# Altium PCB PCB3.PcbDoc
Units mil, origin at the board's own origin, x right, y up, seen from the top; angles counter-clockwise.
Board outline 2145.01 x 1970.03 mil, 2 copper layers (Top Layer, Bottom Layer); 16 components, 14 nets, 32 pads, 0 vias.
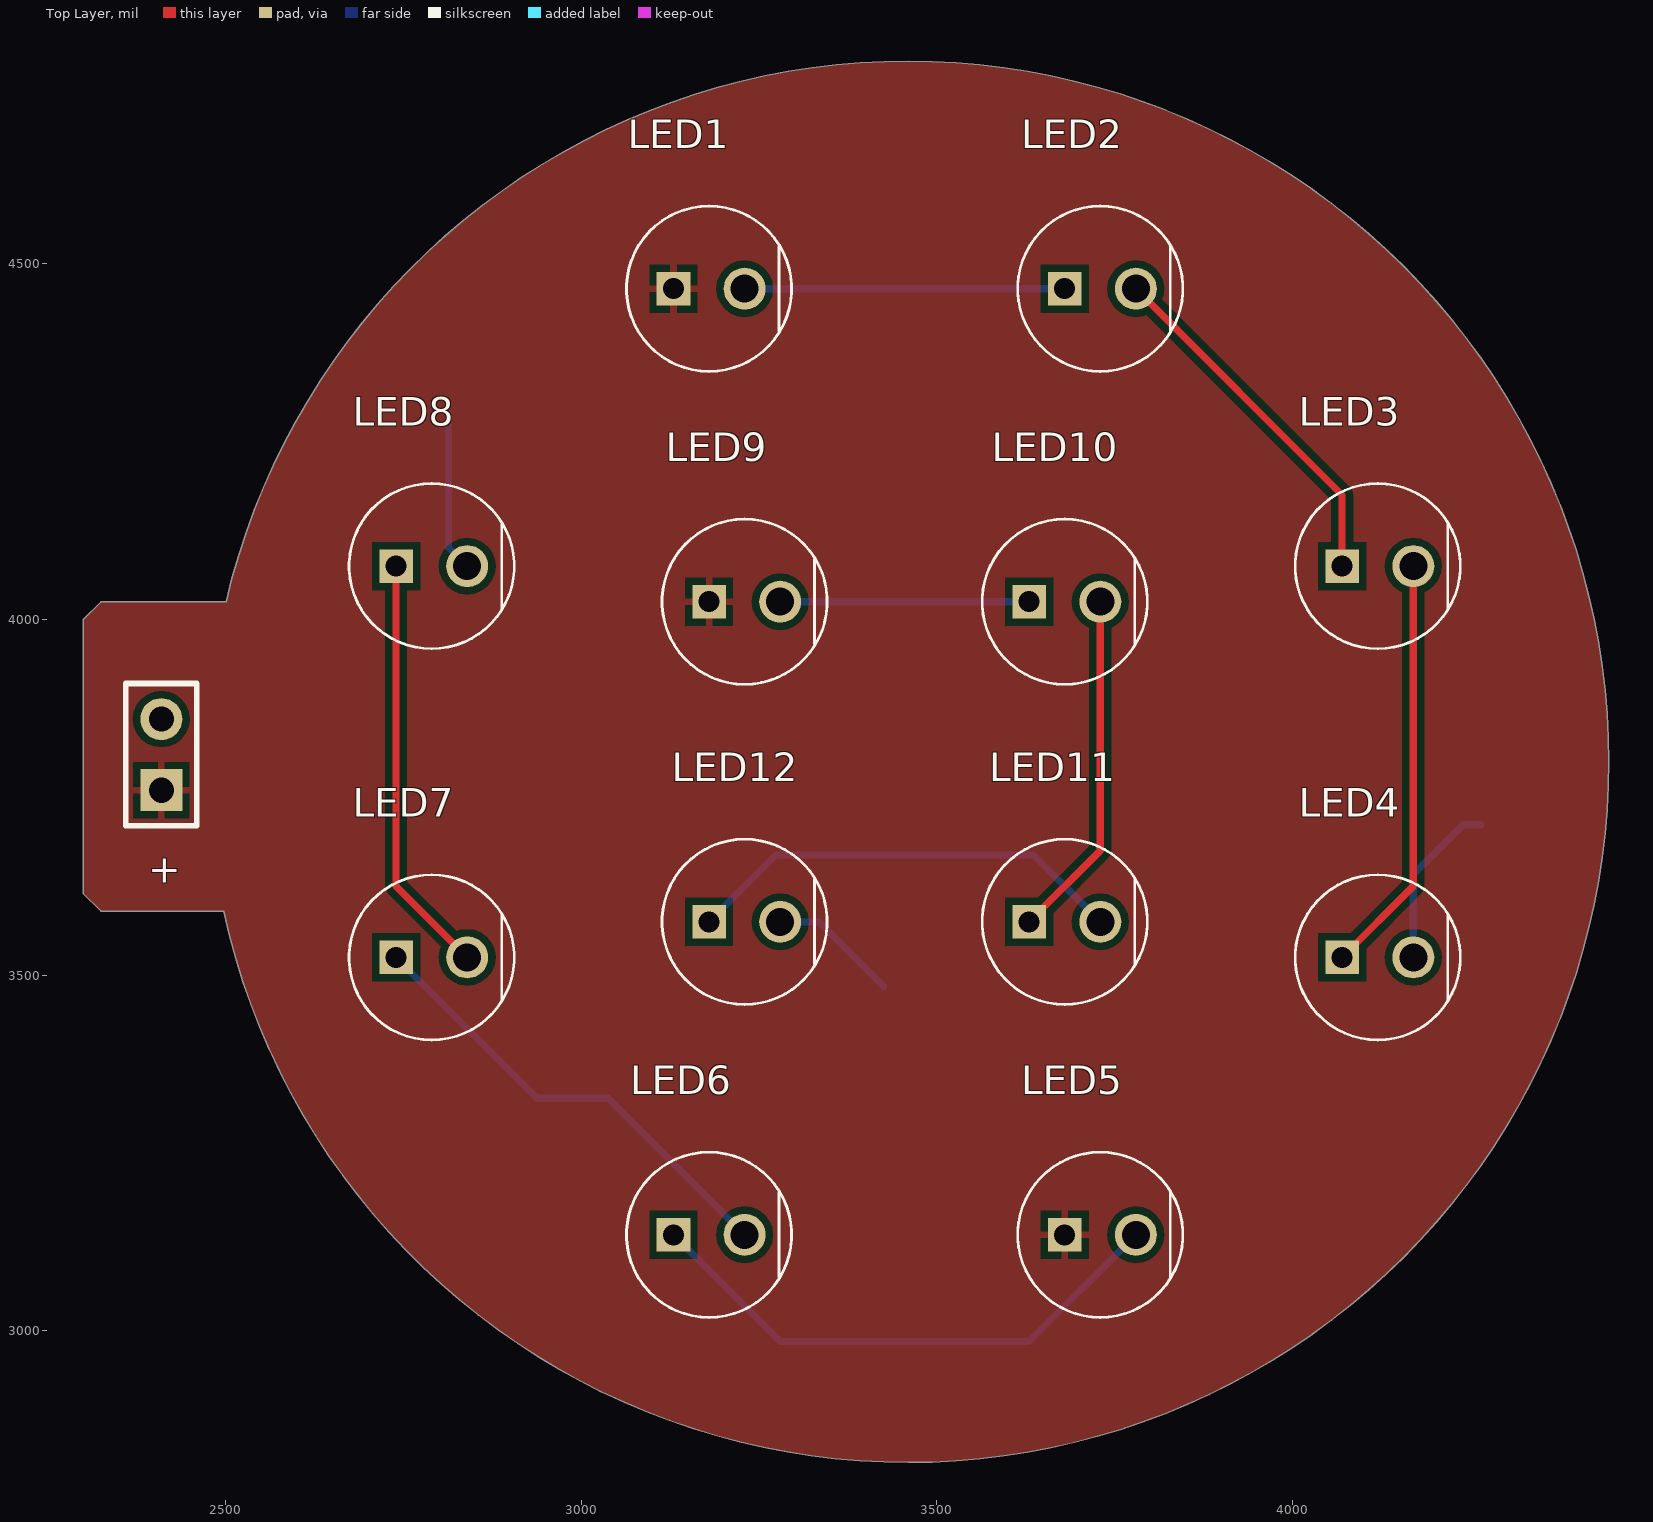
[diagram p0: Top Layer view]
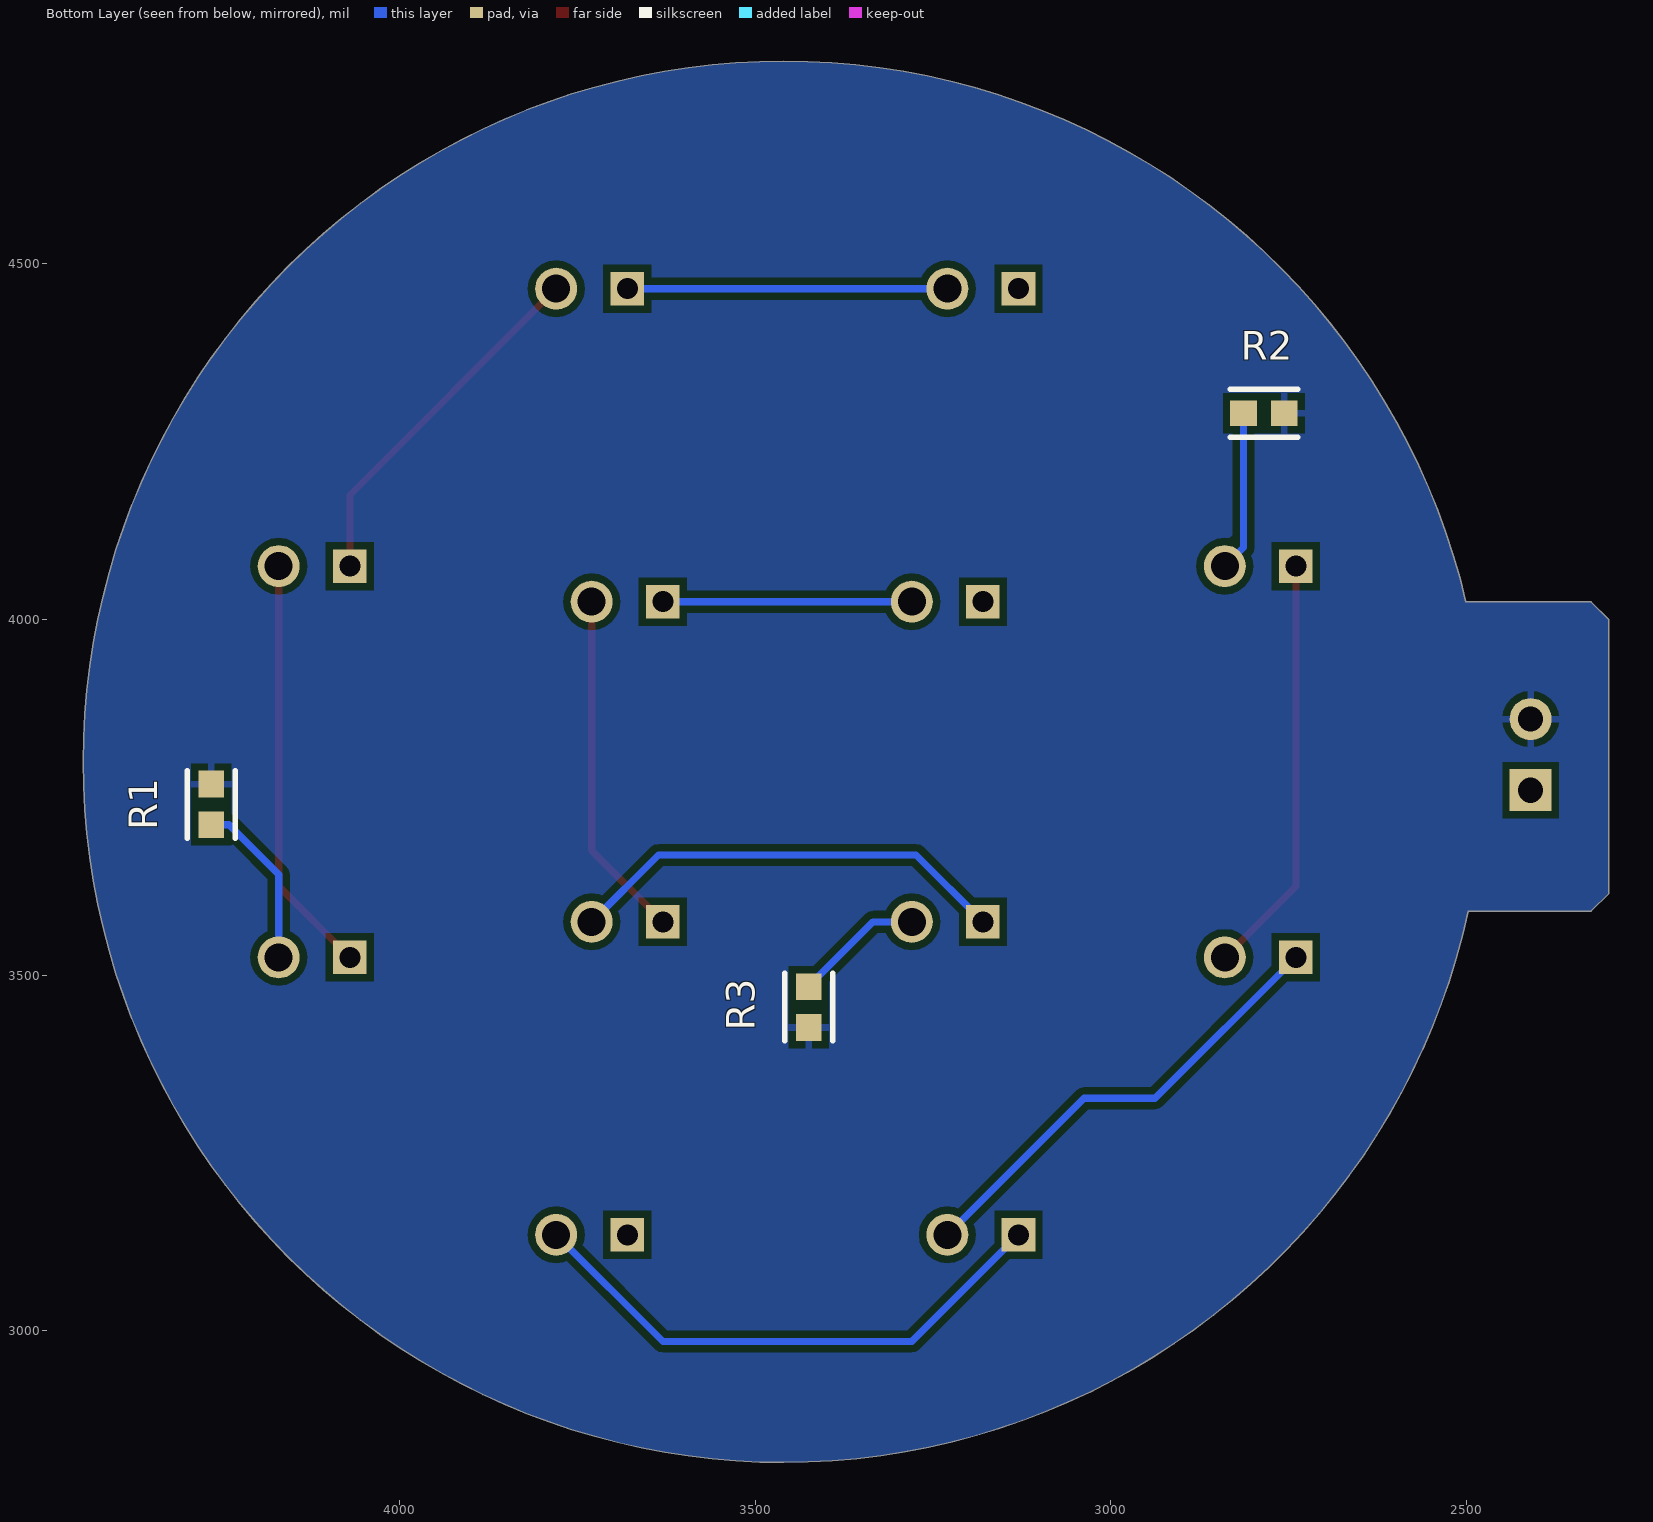
[diagram p1: Bottom Layer view, seen from below]
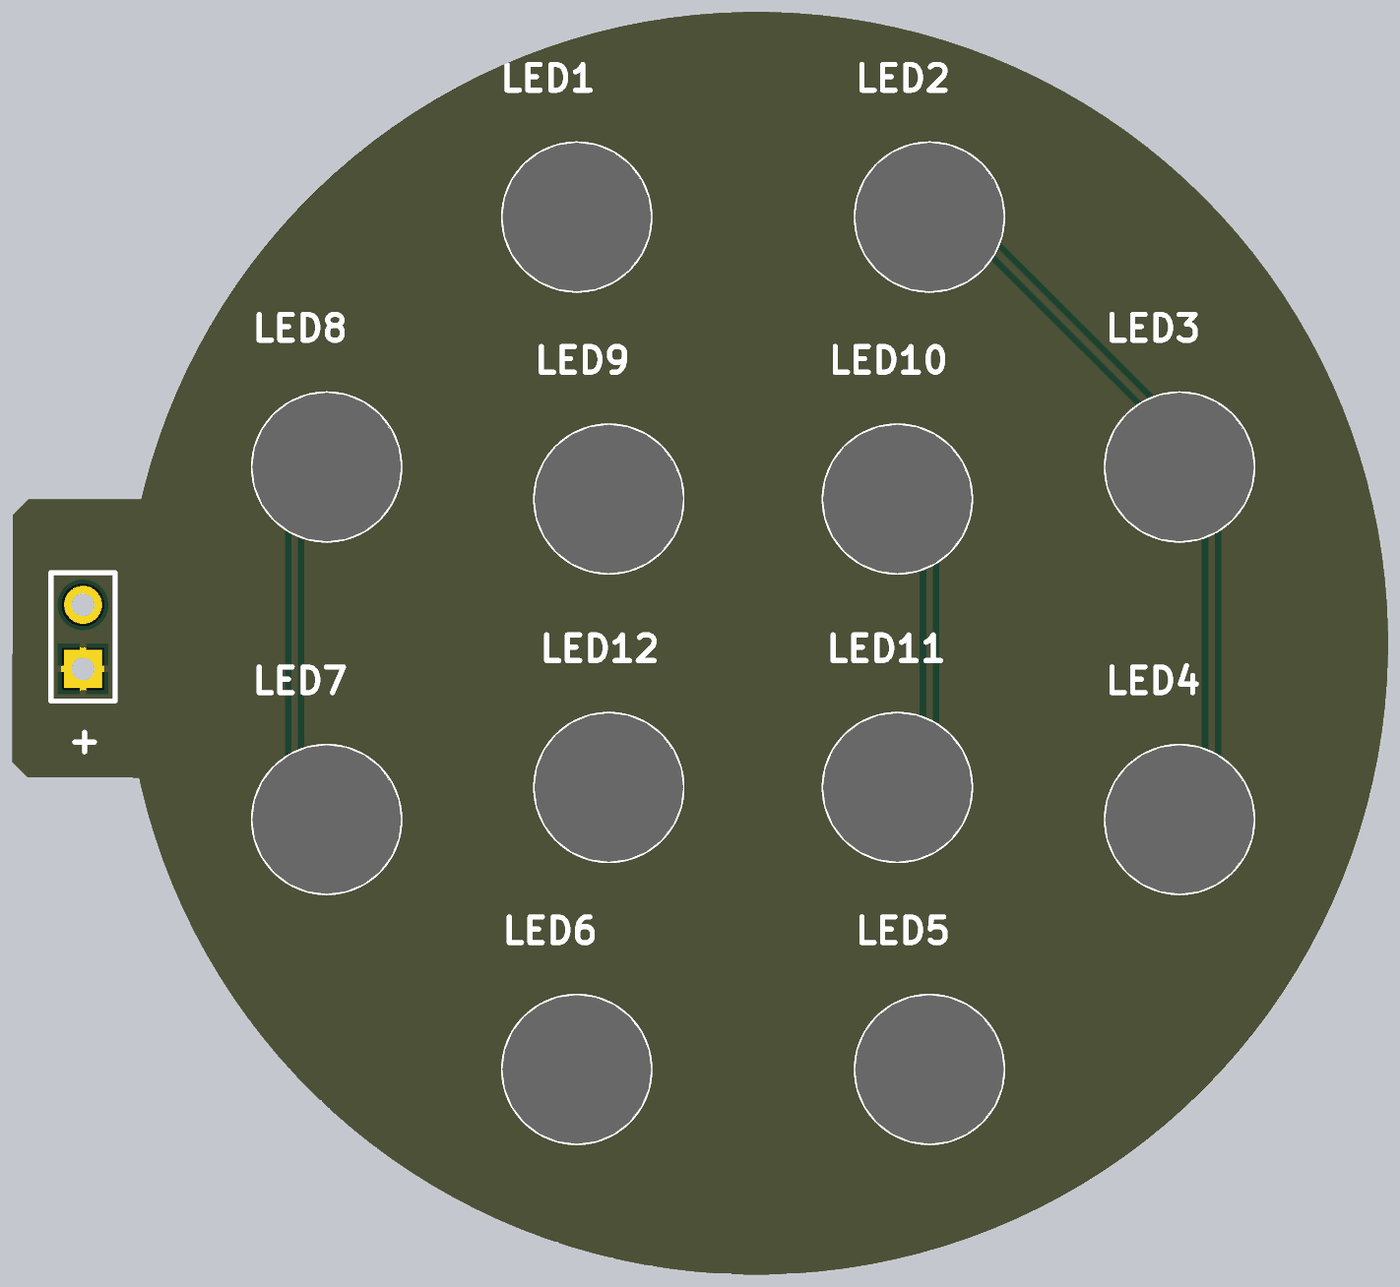
[diagram p2: 3D render of the assembled board from above, using the file's embedded part models]
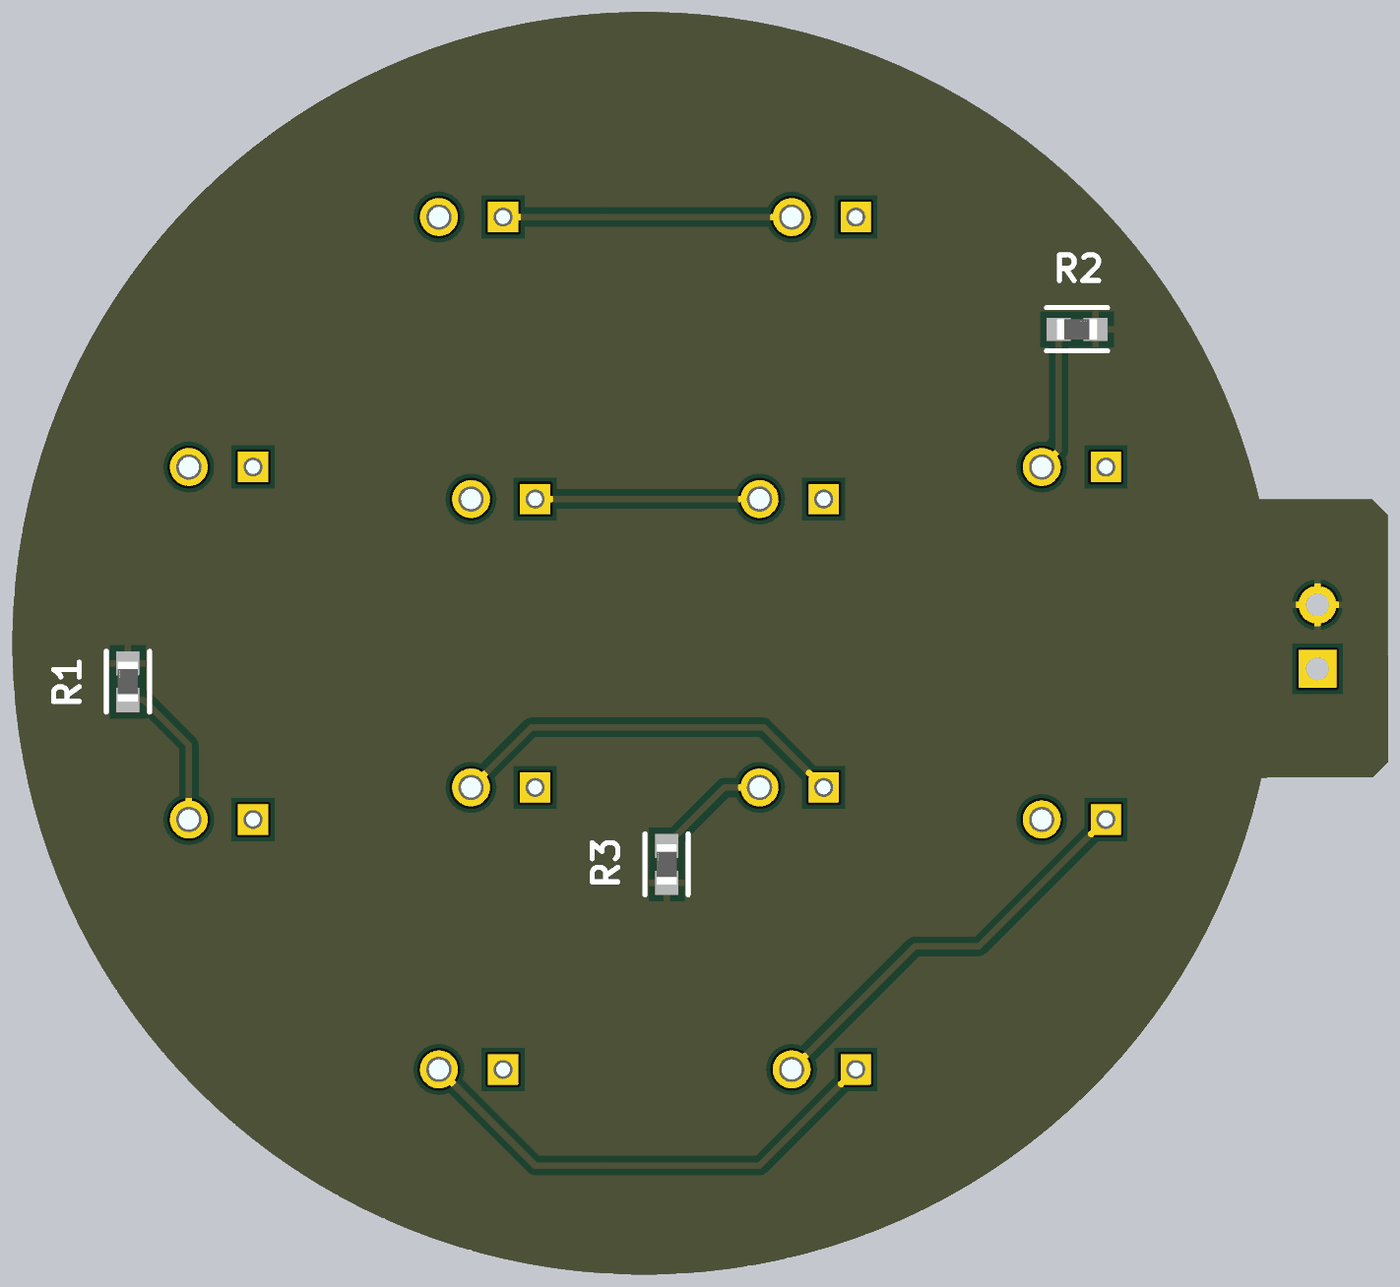
[diagram p3: 3D render of the assembled board from below, using the file's embedded part models]

## Layer stack, top to bottom
Top Solder: solder mask 0.4, Solder Resist, Dk 3.5
Top Layer: signal copper 1.4
Dielectric 1: dielectric 12.6, FR-4, Dk 4.8
Bottom Layer: signal copper 1.4
Bottom Solder: solder mask 0.4, Solder Resist, Dk 3.5

## Board outline
2325,3589.94 2325,3590 2300,3615 2300,4000 2300.23,4000 2325,4024.77 2500.98,4024.77 cw(c3460,3800) 3460,4785.01 cw(c3460,3800) 4445.01,3800 cw(c3460,3800) 3460,2814.99 cw(c3460,3800) 2497.62,3590.04

## Design rules (kind name [scope] priority, off if disabled: settings)
Clearance [All] p1: gap=10 ignorepadtopadclearanceinfootprint=FALSE except(0: Arc-Hole Track-Hole SMDPad-Hole THPad-Hole Via-Hole Fill-Hole Poly-Hole Region-Hole Text-Hole)
PolygonConnect [All] p1: connectstyle=Relief reliefconductorwidth=10 reliefentries=4 polygonreliefangle="90 Angle" airgapwidth=10
RoutingVias [All] p1: holewidth=28 width=50 viastyle="Through Hole" minholewidth=28 minwidth=50 maxholewidth=28 maxwidth=50
SolderMaskExpansion [All] p1: expansion=4 istentingtop=FALSE
Width [All] p1: maxlimit=10 minlimit=10 preferedwidth=10
30 further rules are at their usual default settings.

## Components (designator, comment, footprint, x,y, rotation, side; value= is the part's Value field where it differs from the comment)
+ "Header 2" HDR1X2 2410,3760 r90 top
LED1 "151051BS04000" 151051BS04000 3130,4465 r0 top
LED2 "151051BS04000" 151051BS04000 3680,4465 r0 top
LED3 "151051BS04000" 151051BS04000 4070,4075 r0 top
LED4 "151051BS04000" 151051BS04000 4070,3525 r0 top
LED5 "151051BS04000" 151051BS04000 3680,3135 r0 top
LED6 "151051BS04000" 151051BS04000 3130,3135 r0 top
LED7 "151051BS04000" 151051BS04000 2740,3525 r0 top
LED8 "151051BS04000" 151051BS04000 2740,4075 r0 top
LED9 "151051BS04000" 151051BS04000 3180,4025 r0 top
LED10 "151051BS04000" 151051BS04000 3630,4025 r0 top
LED11 "151051BS04000" 151051BS04000 3630,3575 r0 top
LED12 "151051BS04000" 151051BS04000 3180,3575 r0 top
R1 "CR0603-JW-161ELF" FP-CR0603-IPC_B 4265,3740 r90 bottom
R2 "CR0603-JW-161ELF" FP-CR0603-IPC_B 2785,4290 r180 bottom
R3 "CR0603-JW-161ELF" FP-CR0603-IPC_B 3425,3455 r90 bottom

## Footprints (in the part's own frame and the unit in brackets; to place one, negate y for a bottom-side part, rotate by r counter-clockwise, add the part's x,y. Pads: shape width x height; smd on the part's side, far side on the other; paste and mask are expansions set on the pad)
151051BS04000 [mm]
  rect 1.2x1.2 hole 0.75: 1(0,0)
  round 1.5 hole 1: 2(2.54,0)
  silkscreen extent -1.68,-2.95 4.22,2.95, body extent -1.68,-2.95 4.22,2.95, height 9.05
FP-CR0603-IPC_B [mil]
  rect 37.72x35.91 smd paste+0 mask+0: 1(-28.62,0) 2(28.62,0)
  silkscreen extent -47,-34 47,34, body extent -31,-16 31,16, height 22
HDR1X2 [mm] "Connector; Header; 2 Position"
  rect 1.5x1.5 hole 0.9: 1(0,0)
  round 1.5 hole 0.9: 2(2.54,0)
  silkscreen extent -1.27,-1.27 3.81,1.27

## Part data
+: "Header, 2-Pin", LatestRevisionDate=17-Jul-2002, LatestRevisionNote="Re-released for DXP Platform.", Publisher="Altium Limited"
LED1 LED2 LED3 LED4 LED5 LED6 LED7 LED8 LED9 LED10 LED11 LED12: "LED", Manufacturer_Name="Wurth Elektronik", Mouser Part Number=710-151051BS04000, Datasheet Link=https://katalog.we-online.de/led/datasheet/151051BS04000.pdf, Height=8.95mm, Manufacturer_Part_Number=151051BS04000, Mouser Price/Stock=https://www.mouser.co.uk/ProductDetail/Wurth-Elektronik/151051BS04000?qs=LlUlMxKIyB3OjuZOlqaOjg%3D%3D
R1 R2 R3: library part CMP-1012-00055-2, "Thick Film Chip Resistors 0603 160Ω 0.1W 5% 200ppm/°C", Case Code (Imperial)=0603, Case Code (Metric)=1608, Max Operating Temperature=155°C, Max Power Dissipation=100mW, Min Operating Temperature=-55°C, Package Quantity=5000, Resistance=160R, Temperature Coefficient=200ppm/°C, Tolerance=5%, Voltage Rating=50V, Case/Package=0603, Composition="Thick Film", Contact Plating=Tin, Depth=0.8mm, Features="Moisture Resistant", Height=0.022inch, Length=1.6mm, Military Standard=Not, Mount="Surface Mount", Number of Terminations=2, Packaging="Tape and Reel", Power Rating=100mW, Radiation Hardening=No, Termination=SMD/SMT, Thickness=457um, Width=0.031inch

## Nets (pads, with @x,y where several pads share a name; then routed paths per layer and width w, separated by ;. In a path a pad name is that pad's centre, name@x,y a point inside that pad or via, vN(x,y) a via of type N, cw(c..) or ccw(c..) an arc to the next point about the centre after c; other vN are vias at no path point)
12V: +.1 LED1.1 LED5.1 LED9.1
GND: +.2 R1.2 R2.2 R3.1
NetLED1_2: LED1.2 LED2.1 | length 450
  Bottom Layer w10: LED1.2 LED2.1
NetLED2_2: LED2.2 LED3.1 | length 510.1
  Top Layer w10: LED2.2 4070,4175 LED3.1
NetLED3_2: LED3.2 LED4.1 | length 591.4
  Top Layer w10: LED4.1 4170,3625 LED3.2
NetLED4_2: LED4.2 R1.1 | length 240.4
  Bottom Layer w10: LED4.2 4170,3641.38 4240,3711.38 R1.1
NetLED5_2: LED5.2 LED6.1 | length 774.3
  Bottom Layer w10: LED6.1 3280,2985 3630,2985 LED5.2
NetLED6_2: LED6.2 LED7.1 | length 651.5
  Bottom Layer w10: LED7.1 2938,3327 3038,3327 LED6.2
NetLED7_2: LED7.2 LED8.1 | length 591.4
  Top Layer w10: LED8.1 2740,3625 LED7.2
NetLED8_2: LED8.2 R2.1 | length 225.9
  Bottom Layer w10: R2.1 2813.62,4101.38 LED8.2
NetLED9_2: LED9.2 LED10.1 | length 350
  Bottom Layer w10: LED9.2 LED10.1
NetLED10_2: LED10.2 LED11.1 | length 491.4
  Top Layer w10: LED11.1 3730,3675 LED10.2
NetLED11_2: LED11.2 LED12.1 | length 627.9
  Bottom Layer w10: LED12.1 3274,3669 3636,3669 LED11.2
NetLED12_2: LED12.2 R3.2 | length 183.4
  Bottom Layer w10: LED12.2 3334.53,3575 3425,3484.53 R3.2

## Polygon pours and split planes (outlines as drawn)
12V on Top Layer "12V_L01_P000" (solid, pour order 0): 2325,3589.94 2325,3590 2300,3615 2300,4000 2300.23,4000 2325,4024.77 2500.98,4024.77 cw(c3460,3800) 3460,4785.01 cw(c3460,3800) 4445.01,3800 cw(c3460,3800) 3460,2814.99 cw(c3460,3800) 2497.62,3590.04
GND on Bottom Layer "GND_L02_P001" (solid, pour order 1): 2325,3589.94 2325,3590 2300,3615 2300,4000 2300.23,4000 2325,4024.77 2500.98,4024.77 cw(c3460,3800) 3460,4785.01 cw(c3460,3800) 4445.01,3800 cw(c3460,3800) 3460,2814.99 cw(c3460,3800) 2497.62,3590.04